# EAGLE board igep-lcd (EAGLE 6.2)
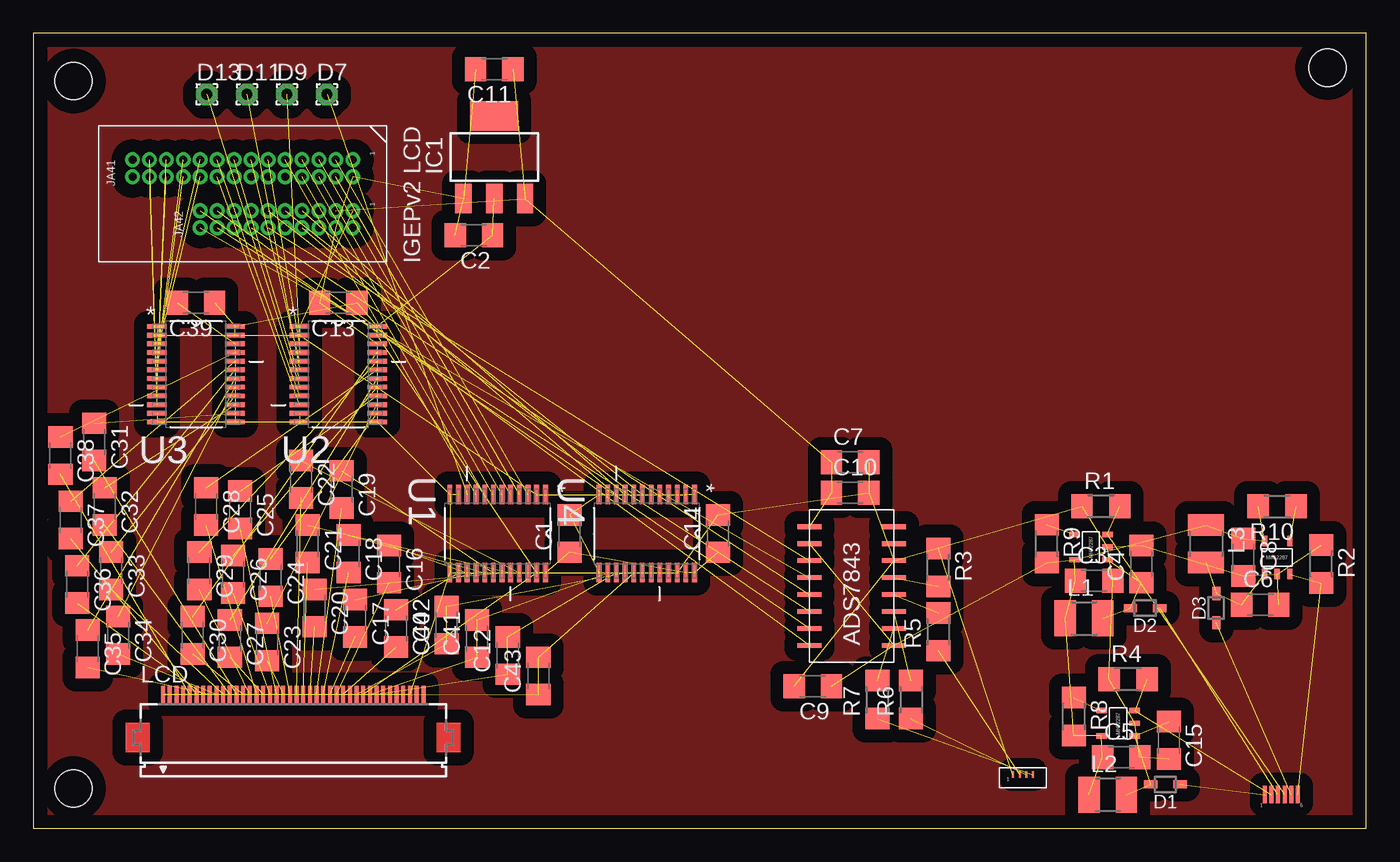
[diagram p0: board, top side]
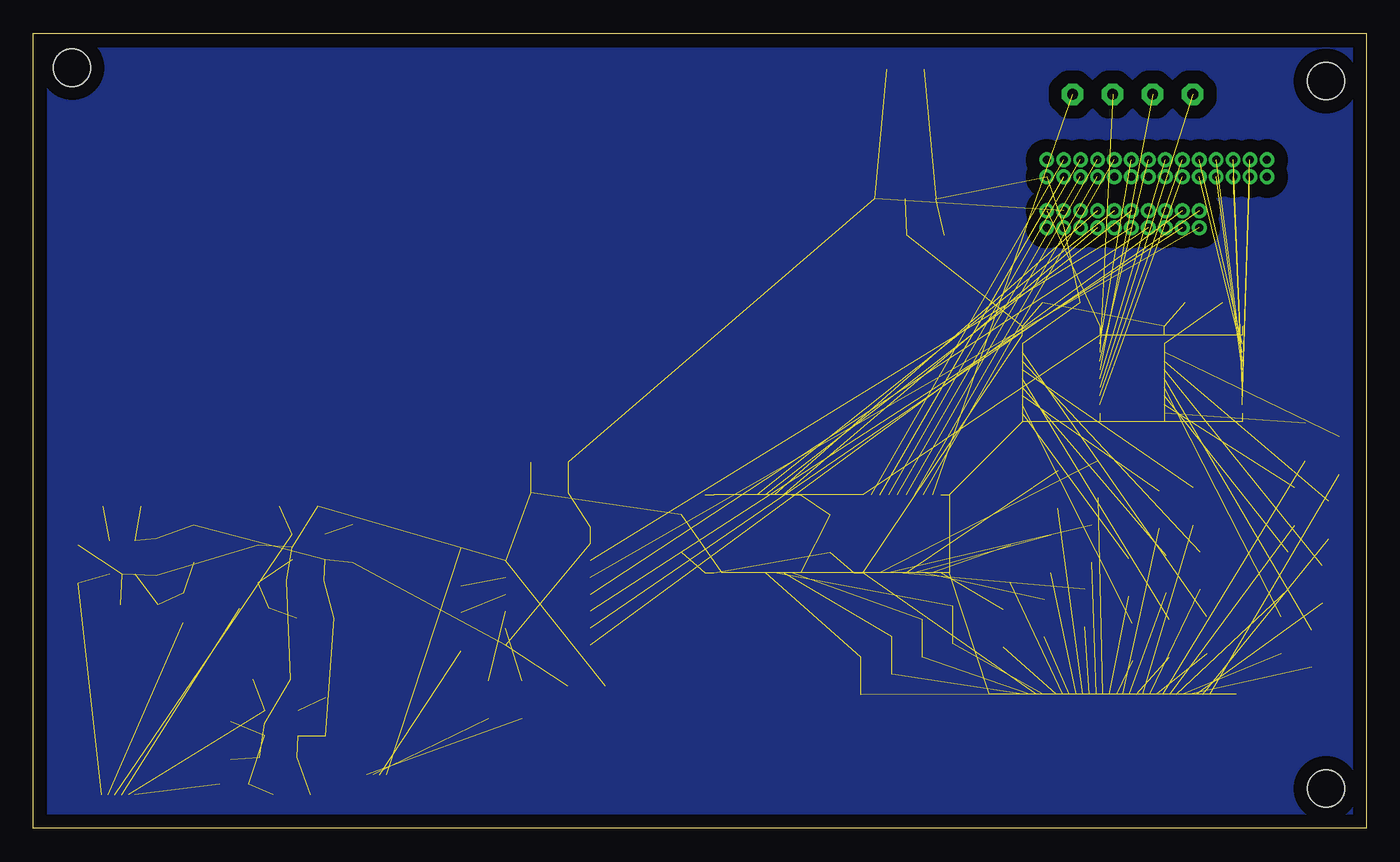
[diagram p1: board, bottom side, seen from below]

Size 99.89 x 59.57 mm. Coordinates in mm from the lower left corner, seen from the top.
Outline: 0,0 99.89,0 99.89,59.57 0,59.57 0,0
Copper layers (1*16): Top 0.035mm / dielectric 1.5mm / Bottom 0.035mm
Design rules: minimum track width 8mil, minimum drill 0.3mm, track to track 9mil, track to pad 9mil, pad to pad 9mil, via to via 9mil, smd to smd 9mil, copper to edge 40mil, drill to drill 4mil, minimum pad ring 10mil, minimum via ring 8mil, stop-mask expansion 4mil, vias tented up to drill 0mil, thermal gap 10mil
Holes 2.8 mm at 97,57 3,3 3,56

## Footprints (pad centres in the part's own frame; a part is rotated, then mirrored left to right if it is on the bottom)
C1206 = smd 1.6 x 1.8: 1 -1.4,0; 2 1.4,0
SOD323 = smd 1 x 0.6: 1 -1.1,0; 2 1.1,0
1,6/0,8 = drill 0.813 pad 1.6 octagon: 1 0,0
SOT223 = smd 1.219 x 2.235: 1 -2.311,-3.099; 2 0,-3.099; 3 2.311,-3.099 | smd 3.6 x 2.2: TAB 0,3.099
R1210 = smd 1.6 x 2.7: 1 -1.4,0; 2 1.4,0
FH12-40S-0.5SH = smd 0.3 x 1.3: 1 -9.75,3.25; 2 -9.25,3.25; 3 -8.75,3.25; 4 -8.25,3.25; 5 -7.75,3.25; 6 -7.25,3.25; 7 -6.75,3.25; 8 -6.25,3.25; 9 -5.75,3.25; 10 -5.25,3.25; 11 -4.75,3.25; 12 -4.25,3.25; 13 -3.75,3.25; 14 -3.25,3.25; 15 -2.75,3.25; 16 -2.25,3.25; 17 -1.75,3.25; 18 -1.25,3.25; 19 -0.75,3.25; 20 -0.25,3.25; 21 0.25,3.25; 22 0.75,3.25; 23 1.25,3.25; 24 1.75,3.25; 25 2.25,3.25; 26 2.75,3.25; 27 3.25,3.25; 28 3.75,3.25; 29 4.25,3.25; 30 4.75,3.25; 31 5.25,3.25; 32 5.75,3.25; 33 6.25,3.25; 34 6.75,3.25; 35 7.25,3.25; 36 7.75,3.25; 37 8.25,3.25; 38 8.75,3.25; 39 9.25,3.25; 40 9.75,3.25
R1206 = smd 1.6 x 1.803: 1 -1.422,0; 2 1.422,0
SOP65P640X120-24N = smd 1.473 x 0.356: 1 -2.921,3.581; 2 -2.921,2.921; 3 -2.921,2.286; 4 -2.921,1.626; 5 -2.921,0.965; 6 -2.921,0.33; 7 -2.921,-0.33; 8 -2.921,-0.965; 9 -2.921,-1.626; 10 -2.921,-2.286; 11 -2.921,-2.921; 12 -2.921,-3.581; 13 2.921,-3.581; 14 2.921,-2.921; 15 2.921,-2.286; 16 2.921,-1.626; 17 2.921,-0.965; 18 2.921,-0.33; 19 2.921,0.33; 20 2.921,0.965; 21 2.921,1.626; 22 2.921,2.286; 23 2.921,2.921; 24 2.921,3.581
IGEP_LCD = drill 0.6: 3V3 -2.54,5.08; ACBIAS 1.27,0; D0 -2.54,3.81; D1 -1.27,3.81; D2 -2.54,2.54; D3 -1.27,2.54; D4 -2.54,1.27; D5 -1.27,1.27; D6 -2.54,0; D7 -1.27,0; D8 -2.54,-1.27; D9 -1.27,-1.27; D10 -2.54,-2.54; D11 -1.27,-2.54; D12 -2.54,-3.81; D13 -1.27,-3.81; D14 -2.54,-5.08; D15 -1.27,-5.08; D16 -2.54,-6.35; D17 -1.27,-6.35; D18 -2.54,-7.62; D19 -1.27,-7.62; D20 -2.54,-8.89; D21 -1.27,-8.89; D22 -2.54,-10.16; D23 -1.27,-10.16; DC_5V 1.27,3.81; GND1 -1.27,5.08; GND2 2.54,3.81; HSYNC 2.54,1.27; I2C3_SCL -2.54,-11.43; I2C3_SDA -1.27,-11.43; LCD_INI 2.54,-3.81; LCD_RESB 1.27,-3.81; MCSPI1_CLK 1.27,-5.08; MCSPI1_CS0 1.27,-6.35; MCSPI1_SIMO 2.54,-5.08; MCSPI1_SOMI 2.54,-6.35; PCLK 1.27,-1.27; PUP 2.54,0; QVGA/NVGA 1.27,-2.54; SYS_BOOT0 1.27,2.54; SYS_BOOT1 2.54,2.54; SYS_BOOT5 2.54,5.08; TS_ENVVDD 2.54,-2.54; TS_NPEN_IRQ 2.54,-1.27; VIO_1V8 1.27,5.08; VSYNC 1.27,1.27
MIC2287 = smd 0.4 x 0.8: EN -0.7,-1.98; FB -0.7,0.5; GND 0.25,0.5; SW 1.2,0.5; VIN 1.2,-1.98
LCD_BL = smd 0.3 x 1.3: VLED_A1 -1.54,0; VLED_A2 -0.54,0; VLED_A3 0.46,0; VLED_C1 -1.04,0; VLED_C2 -0.04,0; VLED_C3 0.96,0
ADS7843 = smd 0.35 x 1.8: P1 -3.81,-3.81; P2 -2.54,-3.81; P3 -1.27,-3.81; P4 0,-3.81; P5 1.27,-3.81; P6 2.54,-3.81; P7 3.81,-3.81; P8 5.08,-3.81; P9 5.08,2.54; P10 3.81,2.54; P11 2.54,2.54; P12 1.27,2.54; P13 0,2.54; P14 -1.27,2.54; P15 -2.54,2.54; P16 -3.81,2.54
TS_CON = smd 0.15 x 0.5: TS1 -1,0.5; TS2 -0.5,0.5; TS3 0,0.5; TS4 0.5,0.5

## Placement (x,y rotation side)
C1  100nF  [C1206]  40.18,22.1 90 top
C2  22uF  [C1206]  33.02,44.45 180 top
C3  1uF  [C1206]  79.5,18.54 0 top
C4  0.22uF  [C1206]  83.06,19.81 90 top
C5  1uF  [C1206]  81.53,5.33 0 top
C6  0.22uF  [C1206]  91.95,16.76 0 top
C7  10uF  [C1206]  61.21,27.43 0 top
C8  1uF  [C1206]  90.68,20.32 270 top
C9  0.1uF  [C1206]  58.42,10.67 180 top
C10  0.1uF  [C1206]  61.21,25.15 0 top
C11  10uF  [C1206]  34.54,56.9 180 top
C12  100nF  [C1206]  35.56,12.95 90 top
C13  100nF  [C1206]  22.86,39.37 180 top
C14  100nF  [C1206]  51.31,22.1 90 top
C15  0.22uF  [C1206]  85.09,6.6 270 top
C16  100nF  [C1206]  26.67,19.81 270 top
C17  100nF  [C1206]  24.13,15.75 270 top
C18  100nF  [C1206]  23.62,20.57 270 top
C19  100nF  [C1206]  23.11,25.4 270 top
C20  100nF  [C1206]  21.08,16.51 270 top
C21  100nF  [C1206]  20.57,21.34 270 top
C22  100nF  [C1206]  20.07,26.16 270 top
C23  100nF  [C1206]  17.53,13.97 270 top
C24  100nF  [C1206]  17.78,18.8 270 top
C25  100nF  [C1206]  15.49,23.88 270 top
C26  100nF  [C1206]  14.99,19.05 270 top
C27  100nF  [C1206]  14.73,14.22 270 top
C28  100nF  [C1206]  12.95,24.13 270 top
C29  100nF  [C1206]  12.45,19.3 270 top
C30  100nF  [C1206]  11.94,14.48 270 top
C31  100nF  [C1206]  4.57,28.96 270 top
C32  100nF  [C1206]  5.33,24.13 270 top
C33  100nF  [C1206]  5.84,19.3 270 top
C34  100nF  [C1206]  6.35,14.48 270 top
C35  100nF  [C1206]  4.06,13.46 270 top
C36  100nF  [C1206]  3.3,18.29 270 top
C37  100nF  [C1206]  2.79,23.11 270 top
C38  100nF  [C1206]  2.03,27.94 270 top
C39  100nF  [C1206]  12.19,39.37 180 top
C40  100nF  [C1206]  27.18,14.99 270 top
C41  100nF  [C1206]  33.27,14.22 90 top
C42  100nF  [C1206]  30.99,15.24 90 top
C43  100nF  [C1206]  37.85,11.43 90 top
D1  CMDSH-3  [SOD323]  84.84,3.3 180 top
D2  CMDSH-3  [SOD323]  83.31,16.51 180 top
D3  CMDSH-3  [SOD323]  88.65,16.51 90 top
D7  [1,6/0,8]  22,55 0 top
D9  [1,6/0,8]  19,55 0 top
D11  [1,6/0,8]  16,55 0 top
D13  [1,6/0,8]  13,55 0 top
IC1  LM1117IMPX-3.3  [SOT223]  34.54,50.29 0 top
L1  10uH  [R1210]  78.74,15.75 0 top
L2  10uH  [R1210]  80.52,2.54 0 top
L3  10uH  [R1210]  87.88,21.34 270 top
LCD  FH12-40S-0.5SH  [FH12-40S-0.5SH]  19.48,6.81 0 top
R1  5.1  [R1206]  80.01,24.13 0 top
R2  5.1  [R1206]  96.52,19.81 270 top
R3  0  [R1206]  67.82,19.56 270 top
R4  5.1  [R1206]  82.04,11.18 0 top
R5  0  [R1206]  67.82,14.73 90 top
R6  0  [R1206]  65.79,9.65 90 top
R7  0  [R1206]  63.25,9.65 90 top
R8  0  [R1206]  77.98,8.38 270 top
R9  0  [R1206]  75.95,21.34 270 top
R10  0  [R1206]  93.22,24.13 180 top
U1  SN74LVC8T245PW  [SOP65P640X120-24N]  34.8,22.1 270 top
U2  SN74LVC8T245PW  [SOP65P640X120-24N]  22.86,34.04 0 top
U3  SN74LVC8T245PW  [SOP65P640X120-24N]  12.19,34.04 0 top
U4  SN74LVC8T245PW  [SOP65P640X120-24N]  45.97,22.1 270 top
U$1  IGEP_LCD  [IGEP_LCD]  18.86,47.55 270 top
U$2  MIC2287  [MIC2287]  82.04,8.13 270 top
U$3  MIC2287  [MIC2287]  80.01,21.34 270 top
U$4  MIC2287  [MIC2287]  93.47,19.56 180 top
U$5  LCD_BL  [LCD_BL]  93.82,2.54 0 top
U$6  ADS7843  [ADS7843]  60.71,17.53 90 top
U$7  TS_CON  [TS_CON]  74.42,3.54 0 top

## Library data of the parts
C1-C43 R1-R10 = rcl
D1-D3 = zetex; MPN: CDSOD323-T05C; OC_FARNELL: 1824860; OC_NEWARK: 79R6078
D7 D9 D11 D13 = wirepad
IC1 = lm1117
L1-L3 = resistor
LCD = con-hirose; MPN: FH12-40S-0.5SH(55); OC_FARNELL: 1324556; OC_NEWARK: 34M6178
U1-U4 = TI-SN74LVC8T245PW; DESCRIPTION: 8-BIT DUAL-SUPPLY BUS TRANSCEIVER WITH CONFIGURABLE VOLTAGE TRANSLATION AND 3-STATE OUTPUTS; MPN: SN74LVC8T245PW; OC_FARNELL: 1236407; OC_NEWARK: 58K6537; PACKAGE: TSSOP-24; SUPPLIER: Texas Instruments
U$1 = igep-lcd
U$2-U$4 = mic2287
U$5 = lcd-bl
U$6 = ads7843
U$7 = ts_con

## Nets
DEN: U4.7 U$1.ACBIAS
HSYNC\: U4.10 U$1.HSYNC
IGEP_LCD_DATA0: U1.3 U$1.D0
IGEP_LCD_DATA1: U1.4 U$1.D1
IGEP_LCD_DATA2: U1.5 U$1.D2
IGEP_LCD_DATA3: U1.6 U$1.D3
IGEP_LCD_DATA4: U1.7 U$1.D4
IGEP_LCD_DATA5: U1.8 U$1.D5
IGEP_LCD_DATA6: U1.9 U$1.D6
IGEP_LCD_DATA7: D7.1 U1.10
IGEP_LCD_DATA8: U2.3 U$1.D8
IGEP_LCD_DATA9: D9.1 U2.4
IGEP_LCD_DATA10: U2.5 U$1.D10
IGEP_LCD_DATA11: D11.1 U2.6
IGEP_LCD_DATA12: U2.7 U$1.D12
IGEP_LCD_DATA13: D13.1 U2.8
IGEP_LCD_DATA14: U2.9 U$1.D14
IGEP_LCD_DATA15: U2.10 U$1.D15
IGEP_LCD_DATA16: U3.3 U$1.D16
IGEP_LCD_DATA17: U3.4 U$1.D17
IGEP_LCD_DATA18: U3.5 U$1.D18
IGEP_LCD_DATA19: U3.6 U$1.D19
IGEP_LCD_DATA20: U3.7 U$1.D20
IGEP_LCD_DATA21: U3.8 U$1.D21
IGEP_LCD_DATA22: U3.9 U$1.D22
IGEP_LCD_DATA23: U3.10 U$1.D23
LCD_DATA0: C22.2 LCD.21
LCD_DATA1: C21.2 LCD.22
LCD_DATA2: C20.2 LCD.23
LCD_DATA3: C19.2 LCD.24
LCD_DATA4: C18.2 LCD.25
LCD_DATA5: C17.2 LCD.26
LCD_DATA6: C16.2 LCD.27
LCD_DATA7: C40.2 LCD.28
LCD_DATA8: C30.2 LCD.13
LCD_DATA9: C29.2 LCD.14
LCD_DATA10: C28.2 LCD.15
LCD_DATA11: C27.2 LCD.16
LCD_DATA12: C26.2 LCD.17
LCD_DATA13: C25.2 LCD.18
LCD_DATA14: C23.2 LCD.19
LCD_DATA15: C24.2 LCD.20
LCD_DATA16: C38.2 LCD.5
LCD_DATA17: C37.2 LCD.6
LCD_DATA18: C36.2 LCD.7
LCD_DATA19: C35.2 LCD.8
LCD_DATA20: C34.2 LCD.9
LCD_DATA21: C33.2 LCD.10
LCD_DATA22: C32.2 LCD.11
LCD_DATA23: C31.2 LCD.12
N$1: U$1.MCSPI1_CLK U$6.P16
N$2: C1.2 C2.2 C3.2 C4.2 C5.2 C6.2 C7.2 C8.2 C9.2 C10.2 C11.2 C13.2 C14.2 C15.2 C39.2 IC1.1 LCD.1 LCD.2 LCD.29 LCD.37 LCD.38 R1.1 R2.1 R4.1 U1.11 U1.12 U1.13 U1.22 U2.11 U2.12 U2.13 U2.22 U3.11 U3.12 U3.13 U3.22 U4.11 U4.12 U4.13 U4.22 U$1.GND1 U$1.GND2 U$2.GND U$3.GND U$4.GND U$6.P6
N$3: R7.1 U$7.TS4
N$4: U1.1 U1.2 U2.1 U2.2 U3.1 U3.2 U4.1 U4.2 U$1.VIO_1V8
N$5: C41.1 C41.2 LCD.32 U4.14
N$6: R6.1 U$7.TS3
N$7: U$1.MCSPI1_CS0 U$6.P15
N$8: C15.1 D1.2 L2.2 U$2.SW
N$9: C12.1 C12.2 LCD.33 U4.15
N$10: C42.1 C42.2 LCD.30 U4.16
N$11: C43.1 C43.2 LCD.34 U4.17
N$12: R5.1 U$7.TS2
N$13: D1.1 U$5.VLED_A1
N$14: R4.2 U$2.FB U$5.VLED_C1
N$15: C4.1 D2.2 L1.2 U$3.SW
N$16: D2.1 U$5.VLED_A2
N$17: R1.2 U$3.FB U$5.VLED_C2
N$18: R3.1 U$7.TS1
N$19: R10.1 U$4.EN
N$20: U$1.TS_NPEN_IRQ U$6.P11
N$21: C6.1 D3.2 L3.2 U$4.SW
N$22: D3.1 U$5.VLED_A3
N$23: R2.2 U$4.FB U$5.VLED_C3
N$24: R9.1 U$3.EN
N$25: U$1.TS_ENVVDD U$6.P13
N$26: U$1.MCSPI1_SIMO U$6.P14
N$27: U$1.MCSPI1_SOMI U$6.P12
N$28: R8.1 U$2.EN
N$29: R3.2 U$6.P5
N$30: C38.1 U3.21
N$31: R5.2 U$6.P4
N$32: C37.1 U3.20
N$33: R6.2 U$6.P3
N$34: R7.2 U$6.P2
N$35: C3.1 C5.1 C7.1 C8.1 C9.1 C10.1 C11.1 IC1.3 L1.1 L2.1 L3.1 R8.2 R9.2 R10.2 U$1.DC_5V U$2.VIN U$3.VIN U$4.VIN U$6.P1 U$6.P9 U$6.P10
N$36: C1.1 C2.1 C13.1 C14.1 C39.1 IC1.2 LCD.3 LCD.4 LCD.31 U1.23 U1.24 U2.23 U2.24 U3.23 U3.24 U4.23 U4.24
N$37: C36.1 U3.19
N$38: C35.1 U3.18
N$39: C34.1 U3.17
N$40: C33.1 U3.16
N$41: C32.1 U3.15
N$42: C31.1 U3.14
N$43: C30.1 U2.21
N$44: C29.1 U2.20
N$45: C28.1 U2.19
N$46: C27.1 U2.18
N$47: C26.1 U2.17
N$48: C25.1 U2.16
N$49: C23.1 U2.15
N$50: C24.1 U2.14
N$51: C22.1 U1.21
N$52: C21.1 U1.20
N$53: C20.1 U1.19
N$54: C19.1 U1.18
N$55: C18.1 U1.17
N$56: C17.1 U1.16
N$57: C16.1 U1.15
N$58: C40.1 U1.14
PCLK: U4.8 U$1.PCLK
VSYNC: U4.9 U$1.VSYNC

## Tracks (layer width: path | path; a pad name or v marks a point on that pad's centre or on a via)
DEN  (1 unrouted)
HSYNC\  (1 unrouted)
IGEP_LCD_DATA0  (1 unrouted)
IGEP_LCD_DATA1  (1 unrouted)
IGEP_LCD_DATA2  (1 unrouted)
IGEP_LCD_DATA3  (1 unrouted)
IGEP_LCD_DATA4  (1 unrouted)
IGEP_LCD_DATA5  (1 unrouted)
IGEP_LCD_DATA6  (1 unrouted)
IGEP_LCD_DATA7  (1 unrouted)
IGEP_LCD_DATA8  (1 unrouted)
IGEP_LCD_DATA9  (1 unrouted)
IGEP_LCD_DATA10  (1 unrouted)
IGEP_LCD_DATA11  (1 unrouted)
IGEP_LCD_DATA12  (1 unrouted)
IGEP_LCD_DATA13  (1 unrouted)
IGEP_LCD_DATA14  (1 unrouted)
IGEP_LCD_DATA15  (1 unrouted)
IGEP_LCD_DATA16  (1 unrouted)
IGEP_LCD_DATA17  (1 unrouted)
IGEP_LCD_DATA18  (1 unrouted)
IGEP_LCD_DATA19  (1 unrouted)
IGEP_LCD_DATA20  (1 unrouted)
IGEP_LCD_DATA21  (1 unrouted)
IGEP_LCD_DATA22  (1 unrouted)
IGEP_LCD_DATA23  (1 unrouted)
LCD_DATA0  (1 unrouted)
LCD_DATA1  (1 unrouted)
LCD_DATA2  (1 unrouted)
LCD_DATA3  (1 unrouted)
LCD_DATA4  (1 unrouted)
LCD_DATA5  (1 unrouted)
LCD_DATA6  (1 unrouted)
LCD_DATA7  (1 unrouted)
LCD_DATA8  (1 unrouted)
LCD_DATA9  (1 unrouted)
LCD_DATA10  (1 unrouted)
LCD_DATA11  (1 unrouted)
LCD_DATA12  (1 unrouted)
LCD_DATA13  (1 unrouted)
LCD_DATA14  (1 unrouted)
LCD_DATA15  (1 unrouted)
LCD_DATA16  (1 unrouted)
LCD_DATA17  (1 unrouted)
LCD_DATA18  (1 unrouted)
LCD_DATA19  (1 unrouted)
LCD_DATA20  (1 unrouted)
LCD_DATA21  (1 unrouted)
LCD_DATA22  (1 unrouted)
LCD_DATA23  (1 unrouted)
N$1  (1 unrouted)
N$2  (45 unrouted)
N$3  (1 unrouted)
N$4  (8 unrouted)
N$5  (3 unrouted)
N$6  (1 unrouted)
N$7  (1 unrouted)
N$8  (3 unrouted)
N$9  (3 unrouted)
N$10  (3 unrouted)
N$11  (3 unrouted)
N$12  (1 unrouted)
N$13  (1 unrouted)
N$14  (2 unrouted)
N$15  (3 unrouted)
N$16  (1 unrouted)
N$17  (2 unrouted)
N$18  (1 unrouted)
N$19  (1 unrouted)
N$20  (1 unrouted)
N$21  (3 unrouted)
N$22  (1 unrouted)
N$23  (2 unrouted)
N$24  (1 unrouted)
N$25  (1 unrouted)
N$26  (1 unrouted)
N$27  (1 unrouted)
N$28  (1 unrouted)
N$29  (1 unrouted)
N$30  (1 unrouted)
N$31  (1 unrouted)
N$32  (1 unrouted)
N$33  (1 unrouted)
N$34  (1 unrouted)
N$35  (20 unrouted)
N$36  (16 unrouted)
N$37  (1 unrouted)
N$38  (1 unrouted)
N$39  (1 unrouted)
N$40  (1 unrouted)
N$41  (1 unrouted)
N$42  (1 unrouted)
N$43  (1 unrouted)
N$44  (1 unrouted)
N$45  (1 unrouted)
N$46  (1 unrouted)
N$47  (1 unrouted)
N$48  (1 unrouted)
N$49  (1 unrouted)
N$50  (1 unrouted)
N$51  (1 unrouted)
N$52  (1 unrouted)
N$53  (1 unrouted)
N$54  (1 unrouted)
N$55  (1 unrouted)
N$56  (1 unrouted)
N$57  (1 unrouted)
N$58  (1 unrouted)
N$59
  pour Top (isolate 1): 1,59 99,59 99,1 1,1
N$60
  pour Bottom (isolate 1): 1,59 99,59 99,1 1,1
PCLK  (1 unrouted)
VSYNC  (1 unrouted)